# EAGLE board thermal-flashlight-32u4-many (EAGLE 6.5.0)
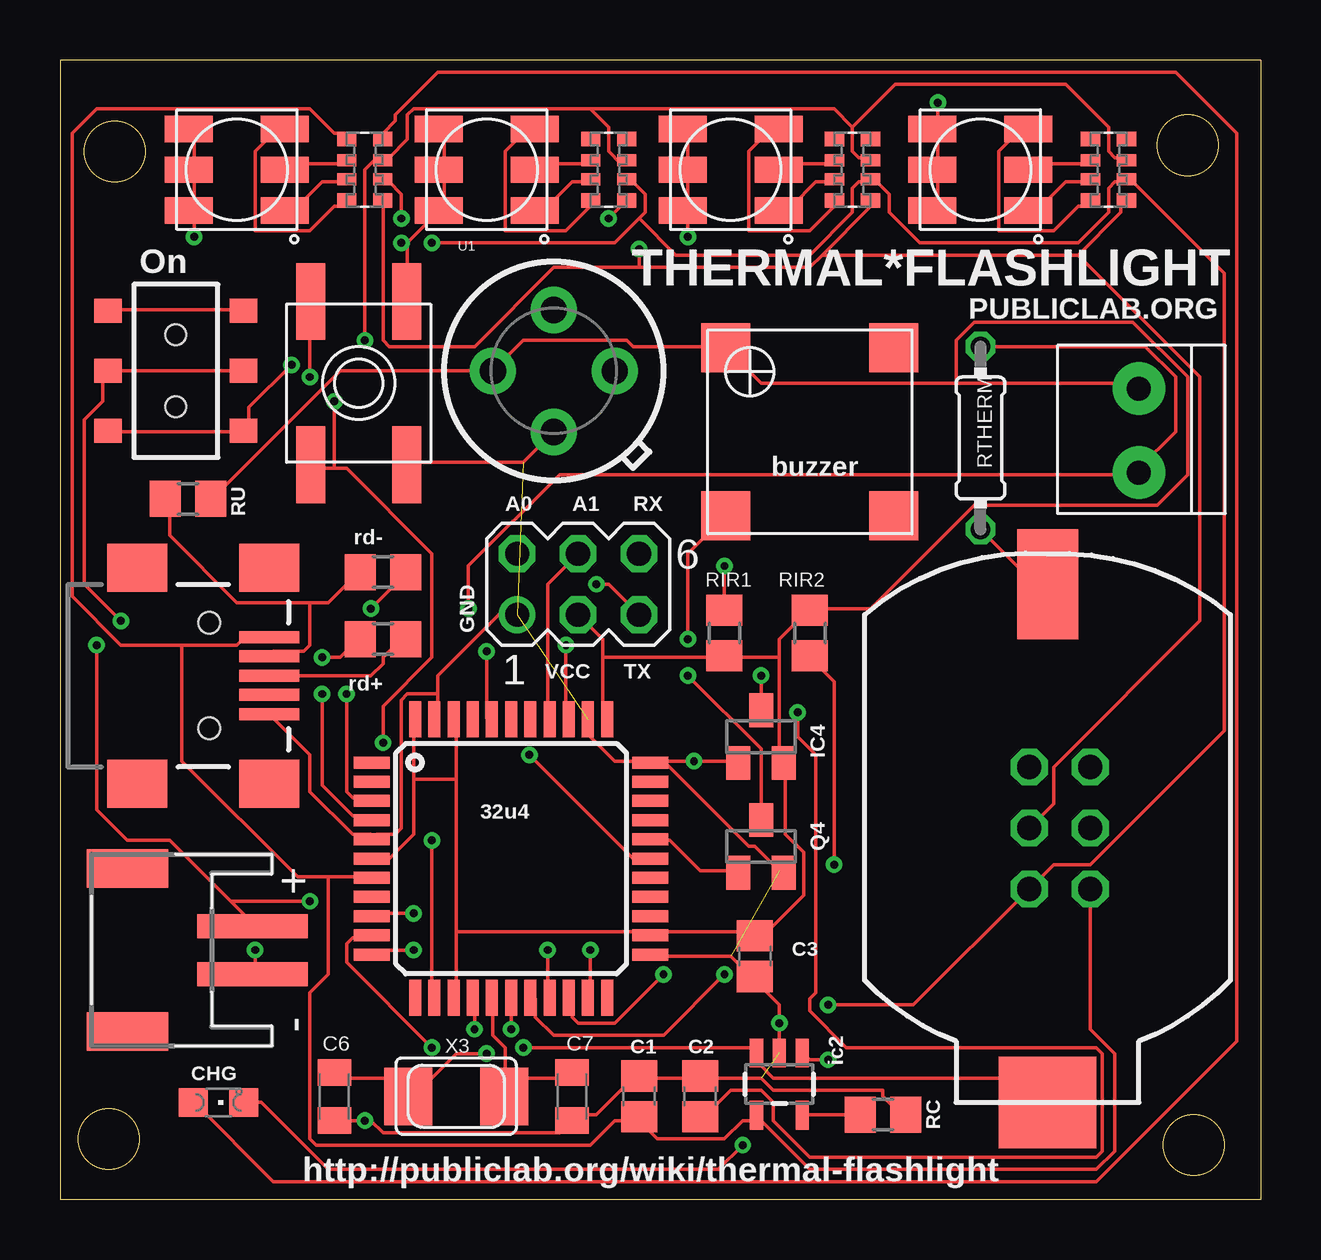
[diagram p0: board, top side]
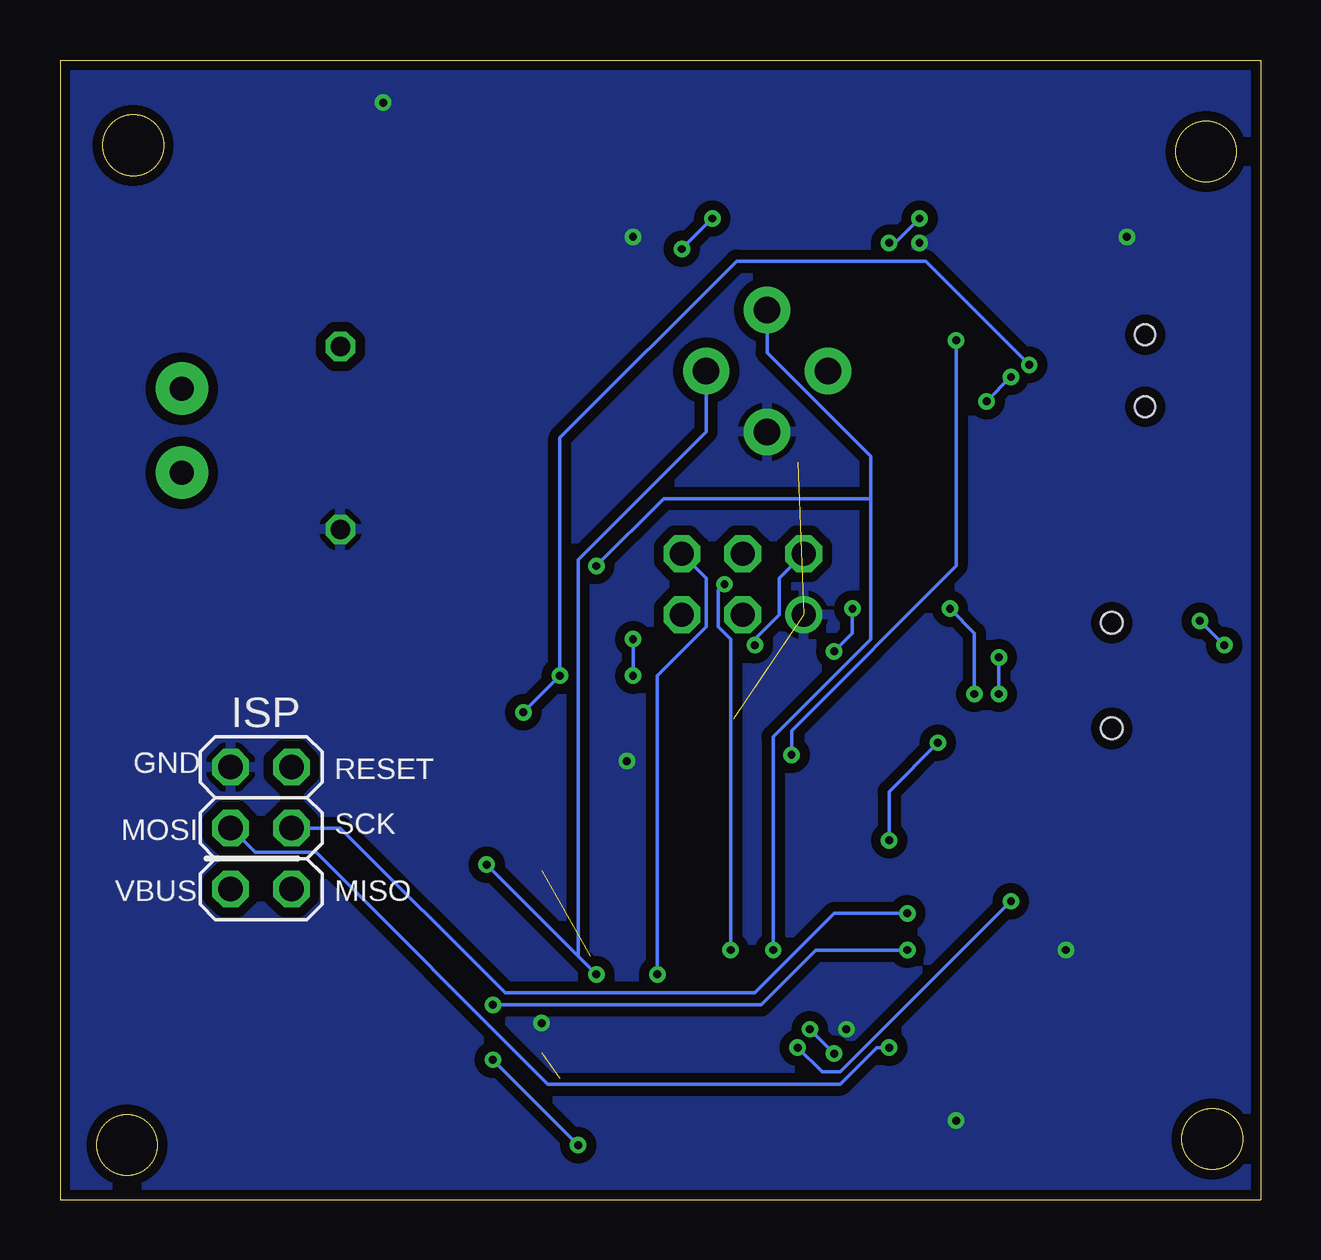
[diagram p1: board, bottom side, seen from below]

Size 50.04 x 47.5 mm. Coordinates in mm from the lower left corner, seen from the top.
Outline: 50.04,47.5 0,47.5 0,0 50.04,0 50.04,47.5
Outline: circle at 2.03,2.54 radius 1.27
Outline: circle at 2.29,43.69 radius 1.27
Outline: circle at 46.99,43.94 radius 1.27
Outline: circle at 47.24,2.29 radius 1.27
Copper layers (1*16): Top 0.0356mm / dielectric 1.5011mm / Bottom 0.0356mm
Design rules "LaenPCBOrder": minimum track width 6mil, minimum drill 13mil, track to track 6mil, track to pad 6mil, pad to pad 6mil, via to via 6mil, smd to smd 6mil, copper to edge 15mil, drill to drill 6mil, minimum pad ring 7mil, minimum via ring 7mil, stop-mask expansion 3mil, vias tented up to drill 0mil, thermal gap 10mil
Net classes: 1 power: width 0.254 mm, clearance 0.203 mm
vRestrict: area 5.8,3.6 to 7.4,4.3

## Footprints (pad centres in the part's own frame; a part is rotated, then mirrored left to right if it is on the bottom)
BATTCOM_20MM_PTH_SMT = smd 4.572 x 2.54: P$1 0,0 | smd 3.81 x 4.064: P$2 21.59,0
EVQ-Q2 = smd 3.2 x 1.2: A -3.4,-2; A' 3.4,-2; B -3.4,2; B' 3.4,2
C0805 = smd 1.3 x 1.5: 1 -0.85,0; 2 0.85,0
C0805K = smd 1.1 x 1.4: 1 -1,0; 2 1,0
CHIPLED_0805 = smd 1.2 x 1.2: A 0,-1.05; C 0,1.05
JST-PH-2-SMT-RA = smd 1 x 4.6: 1 1,-3.7; 2 -1,-3.7 | smd 1.6 x 3.4: NC1 -3.4,1.5; NC2 3.4,1.5
SOT23-5 = smd 0.55 x 1.2: 1 -0.95,-1.3; 2 0,-1.3; 3 0.95,-1.3; 4 0.95,1.3; 5 -0.95,1.3
TQFP44 = smd 1.5 x 0.5: 1 -5.8,4; 2 -5.8,3.2; 3 -5.8,2.4; 4 -5.8,1.6; 5 -5.8,0.8; 6 -5.8,0; 7 -5.8,-0.8; 8 -5.8,-1.6; 9 -5.8,-2.4; 10 -5.8,-3.2; 11 -5.8,-4; 23 5.8,-4; 24 5.8,-3.2; 25 5.8,-2.4; 26 5.8,-1.6; 27 5.8,-0.8; 28 5.8,0; 29 5.8,0.8; 30 5.8,1.6; 31 5.8,2.4; 32 5.8,3.2; 33 5.8,4 | smd 0.5 x 1.5: 12 -4,-5.8; 13 -3.2,-5.8; 14 -2.4,-5.8; 15 -1.6,-5.8; 16 -0.8,-5.8; 17 0,-5.8; 18 0.8,-5.8; 19 1.6,-5.8; 20 2.4,-5.8; 21 3.2,-5.8; 22 4,-5.8; 34 4,5.8; 35 3.2,5.8; 36 2.4,5.8; 37 1.6,5.8; 38 0.8,5.8; 39 0,5.8; 40 -0.8,5.8; 41 -1.6,5.8; 42 -2.4,5.8; 43 -3.2,5.8; 44 -4,5.8
SOT23 = smd 1 x 1.4: 1 -0.95,-1.1; 2 0.95,-1.1; 3 0,1.1
2X03 = drill 1.016 octagon: 1 -2.54,-1.27; 2 -2.54,1.27; 3 0,-1.27; 4 0,1.27; 5 2.54,-1.27; 6 2.54,1.27
AYZ0202 = smd 1 x 1.15: 1 -2.5,2.825; 2 0,2.825; 3 2.5,2.825; 4 -2.5,-2.825; 5 0,-2.825; 6 2.5,-2.825 | hole 0.85: 1.5,0; -1.5,0
1X2-3.5MM = drill 1 pad 2.184: 1 1.8,0; 2 -1.7,0
RGBLED5050 = smd 2 x 1.1: 1 -2,1.7; 2 -2,0; 3 -2,-1.7; 4 2,-1.7; 5 2,0; 6 2,1.7
R0805 = smd 1.3 x 1.5: 1 -0.95,0; 2 0.95,0
EXB38V = smd 0.6 x 0.8: 1 -1.275,-0.75; 4 1.275,-0.75; 5 1.275,0.75; 8 -1.275,0.75 | smd 0.5 x 0.8: 2 -0.4,-0.75; 3 0.4,-0.75; 6 0.4,0.75; 7 -0.4,0.75
0204/7 = drill 0.813 octagon: 1 -3.81,0; 2 3.81,0
MA03-2 = drill 1.016: 1 -2.54,-1.27 | drill 1.016 octagon: 2 -2.54,1.27; 3 0,-1.27; 4 0,1.27; 5 2.54,-1.27; 6 2.54,1.27
TO-39 = drill 1.1 pad 1.93: 1 2.54,0; 2 0,2.54; 3 -2.54,0; 4 0,-2.54
SMT-8585-BUZZER = smd 2.05 x 2.05: + -3.5,-3.5; - 3.5,-3.5; NC1 -3.5,3.5; NC2 3.5,3.5
USB-MINIB = smd 2.5 x 0.5: D+ 2.5,0; D- 2.5,0.8; GND 2.5,-1.6; ID 2.5,-0.8; VBUS 2.5,1.6 | smd 2.5 x 2: GND@1 -3,-4.5; GND@2 -3,4.5; GND@3 2.5,4.5; GND@4 2.5,-4.5 | hole 0.9: 0,2.2; 0,-2.2
NX5032 = smd 2 x 2.4: P$1 2,0; P$2 -2,0

## Placement (x,y rotation side)
BAT1  LIR2032  [BATTCOM_20MM_PTH_SMT]  41.15,25.65 270 top
BTN  [EVQ-Q2]  12.45,34.04 90 top
C1  10u  [C0805]  24.13,4.32 90 top
C2  10u  [C0805]  26.67,4.32 90 top
C3  10u  [C0805]  28.96,10.16 270 top
C6  18pF  [C0805K]  11.43,4.32 270 top
C7  18pF  [C0805K]  21.34,4.32 270 top
CHG  0805  [CHIPLED_0805]  6.6,4.06 270 top
CN1  [JST-PH-2-SMT-RA]  4.32,10.41 90 top
IC2  MCP73831  [SOT23-5]  29.97,4.83 180 top
IC3  ATMEGA32U4-AU  [TQFP44]  18.8,14.22 0 top
IC4  MCP1700-33  [SOT23]  29.21,19.3 0 top
ISP  [2X03]  41.66,15.49 90 bottom
J1  AYZ0202  [AYZ0202]  4.83,34.54 90 top
J2  1X2-3.5MM  [1X2-3.5MM]  44.96,32 90 top
LED  RGBLED5050  [RGBLED5050]  7.37,42.93 180 top
LED1  RGBLED5050  [RGBLED5050]  17.78,42.93 180 top
LED2  RGBLED5050  [RGBLED5050]  27.94,42.93 180 top
LED3  RGBLED5050  [RGBLED5050]  38.35,42.93 180 top
Q4  BSS123  [SOT23]  29.21,14.73 0 top
RC  22K  [R0805]  34.29,3.56 180 top
RD+  47  [R0805]  13.46,23.37 180 top
RD-  47  [R0805]  13.46,26.16 0 top
RIR1  10K  [R0805]  27.69,23.62 270 top
RIR2  10K  [R0805]  31.24,23.62 90 top
RN1  [EXB38V]  12.7,42.93 90 top
RN2  [EXB38V]  22.86,42.93 90 top
RN3  [EXB38V]  33.02,42.93 90 top
RN4  [EXB38V]  43.69,42.93 90 top
RTHERM  330  [0204/7]  38.35,31.75 90 top
RU  1.5K  [R0805]  5.33,29.21 0 top
SV1  [MA03-2]  21.59,25.65 0 top
U1  MLX90614_  [TO-39]  20.57,34.54 0 top
U$1  BUZZER  [SMT-8585-BUZZER]  31.24,32 270 top
X1  USBSMD  [USB-MINIB]  6.22,21.84 0 top
X3  8MHz  [NX5032]  16.51,4.32 0 top

## Library data of the parts
BAT1 IC2 J1 = SparkFunNew
BTN C6 C7 CN1 IC4 J2 LED LED1-LED3 U$1 = adafruit
C1-C3 = resistor
CHG = led
IC3 X3 = adaprog
ISP = pinhead
Q4 = transistor-small-signal
RC RD+ RD- RIR1 RIR2 RTHERM RU = rcl
RN1-RN4 = resistor-dil; OC_FARNELL: unknown; OC_NEWARK: unknown
SV1 = con-lstb; OC_FARNELL: unknown; OC_NEWARK: unknown
U1 X1 = SparkFun

## Nets
A0: IC3.36 SV1.2
A1: IC3.37 SV1.4
A2: IC3.38
A3: IC3.39
A4: IC3.40 J2.2 RTHERM.2
A5: IC3.41
D0/RX: IC3.20 SV1.6
D1/TX: IC3.21 SV1.5
D4_A6: IC3.25
D6*: IC3.27
D7: IC3.1
D8: IC3.28 RN1.3 RN2.3 RN3.3 RN4.3
D9: IC3.29 Q4.1
D11: IC3.12
D+: RD+.1 X1.D+
D-: RD-.1 RU.1 X1.D-
GND: BAT1.P$1 BTN.A BTN.A' C1.2 C2.2 C3.2 C6.2 C7.2 CN1.2 IC2.2 IC3.5 IC3.15 IC3.23 IC3.33 IC3.35 IC3.43 IC4.1 ISP.6 LED1.4 LED1.5 LED1.6 LED2.4 LED2.5 LED2.6 LED3.4 LED3.5 LED3.6 LED.4 LED.5 LED.6 Q4.2 RC.1 RTHERM.1 SV1.1 U1.4 X1.GND
IO10*: IC3.30
IO12*: IC3.26
MISO: IC3.11 ISP.1 RN1.2 RN2.2 RN3.2 RN4.2
MOSI: IC3.10 ISP.4
N$1: J1.3 J1.6
N$2: LED1.3 RN2.8
N$3: LED1.1 RN2.7
N$4: LED.3 RN1.8
N$5: CHG.C IC2.1
N$6: IC2.5 RC.2
N$7: Q4.3 U$1.-
N$8: LED.1 RN1.7
N$9: LED.2 RN1.6
N$10: CHG.A RN1.4
N$11: IC3.4 RD+.2
N$12: LED1.2 RN2.6
N$13: LED2.3 RN3.8
N$14: LED2.1 RN3.7
N$15: C7.1 IC3.16 X3.P$1
N$16: C6.1 IC3.17 X3.P$2
N$17: LED2.2 RN3.6
N$18: IC3.3 RD-.2
N$19: LED3.3 RN4.8
N$20: LED3.1 RN4.7
N$21: LED3.2 RN4.6
PC6: IC3.31
PC7: IC3.32
RESET: ISP.5
RST: BTN.B BTN.B' IC3.13
RXLED/SS: IC3.8
SCK: IC3.9 ISP.3 RN1.1 RN2.1 RN3.1 RN4.1
SCL: IC3.18 RIR2.1 U1.1
SDA: IC3.19 RIR1.1 U1.2
TXLED: IC3.22
VBAT: BAT1.P$2 CN1.1 IC2.3 J1.2 J1.5
VBUS: C1.1 IC2.4 IC3.7 ISP.2 RN1.5 X1.VBUS
VCC: C3.1 IC3.6 IC3.14 IC3.24 IC3.34 IC3.42 IC3.44 IC4.2 J2.1 RIR1.2 RIR2.2 RU.2 SV1.3 U1.3 U$1.+
VDD: C2.1 IC4.3 J1.1 J1.4

## Tracks (layer width: path | path; a pad name or v marks a point on that pad's centre or on a via)
A0  (via drill 0.33)
  Top 0.152: v21.08,23.11 21.08,20.07 IC3.36
  Bottom 0.152: v21.08,23.11 21.08,23.37 20.07,24.38 20.07,25.91 SV1.2
A1
  Top 0.152: SV1.4 20.32,25.65 20.32,20.07 IC3.37
A4  (via drill 0.33)
  Top 0.152: v17.78,22.86 17.78,20.07 IC3.40 | v17.02,24.64 17.02,26.42 20.83,30.23 44.96,30.23 J2.2 44.96,30.48 46.48,32 46.48,34.29 45.21,35.56 RTHERM.2
  Bottom 0.152: v17.78,22.86 17.02,23.62 v17.02,24.64
D0/RX  (via drill 0.33)
  Top 0.152: v25.15,9.4 23.11,7.37 21.59,7.37 21.34,7.62 21.34,8.38 IC3.20
  Bottom 0.152: v25.15,9.4 25.15,21.84 23.11,23.88 23.11,25.91 SV1.6
D1/TX  (via drill 0.33)
  Top 0.152: v22.1,10.41 22.1,8.64 IC3.21 | v22.35,25.65 22.86,25.65 SV1.5
  Bottom 0.152: v22.1,10.41 22.1,23.37 22.61,23.88 22.61,25.4 v22.35,25.65
D8  (via drill 0.33)
  Top 0.152: 22.1,45.47 14.73,45.47 14.48,45.21 14.48,44.2 13.72,43.43 13.46,43.43 RN1.3 13.21,43.43 12.7,42.93 v12.7,35.81 | 22.1,45.47 22.86,44.7 22.86,43.69 23.37,43.18 RN2.3 | 33.02,44.7 33.02,43.69 33.27,43.43 33.53,43.43 RN3.3 | 33.02,44.7 32.26,45.47 22.1,45.47 | 33.02,44.7 34.8,46.48 41.91,46.48 43.69,44.7 43.69,43.69 43.94,43.43 44.2,43.43 RN4.3 | IC3.28 23.88,14.22 v19.56,18.54
  Bottom 0.152: v19.56,18.54 19.56,19.56 12.7,26.42 v12.7,35.81
D9
  Top 0.152: Q4.1 28.19,13.72 26.67,13.72 25.4,14.99 24.64,14.99 IC3.29
D+
  Top 0.152: X1.D+ 12.95,21.84 13.46,22.35 13.46,22.61 14.22,23.37 RD+.1
D-
  Top 0.152: 10.41,24.89 11.18,24.89 12.45,26.16 RD-.1 | 10.41,24.89 7.37,24.89 4.57,27.69 4.57,29.21 RU.1 | 10.41,24.89 10.41,23.11 10.16,22.86 8.89,22.86 X1.D-
GND  (via drill 0.33)  (4 unrouted)
  Top 0.152: C6.2 11.43,3.3 v12.7,3.3 12.95,3.3 13.46,2.79 20.83,2.79 21.34,3.3 C7.2 21.34,3.56 22.35,3.56 24.13,5.33 C1.2 24.13,5.08 26.67,5.08 | 26.67,5.08 29.21,5.08 29.72,4.57 34.29,4.57 34.29,4.32 35.05,3.56 RC.1 | 26.67,5.08 C2.2 | 25.15,18.29 24.64,18.29 IC3.33 | 25.15,18.29 v26.42,18.29 28.19,18.29 IC4.1 | 25.15,18.29 28.7,14.73 28.96,14.73 29.97,13.72 Q4.2 | 25.15,18.29 IC3.33 | IC3.35 22.1,19.81 22.1,19.3 23.11,18.29 24.38,18.29 IC3.33 | 16,42.93 16,41.4 LED1.6 15.75,41.15 14.48,39.88 | 16,42.93 16,44.45 LED1.4 | 16,42.93 LED1.5 | 14.48,39.88 14.48,37.59 BTN.A' | X1.GND 8.89,20.07 10.41,18.54 10.41,17.02 12.19,15.24 12.95,15.24 IC3.5 13.21,15.24 13.97,15.24 14.22,15.49 14.22,20.83 14.48,21.08 15.75,21.08 | IC2.2 v29.97,7.37 29.97,8.13 28.96,9.14 | 28.96,9.14 27.94,10.16 24.64,10.16 IC3.23 | 28.96,9.14 C3.2 | 36.58,42.93 36.58,41.4 LED3.6 | 36.58,42.93 36.58,44.45 LED3.4 36.58,44.7 v36.58,45.72 | 36.58,42.93 LED3.5 | 26.16,42.93 26.16,41.4 LED2.6 26.16,41.15 v26.16,40.13 | 26.16,42.93 26.16,44.45 LED2.4 | 26.16,42.93 LED2.5 | 5.59,42.93 5.59,41.4 LED.6 5.59,41.15 v5.59,40.13 | 5.59,42.93 5.59,44.45 LED.4 | 5.59,42.93 LED.5 | v17.27,7.11 17.27,8.38 IC3.15 | 15.75,21.08 15.75,21.84 18.29,24.38 SV1.1 | 15.75,21.08 15.75,20.07 IC3.43 | U1.4 19.3,30.73 14.48,30.73 BTN.A | BAT1.P$1 40.64,25.65 RTHERM.1 | v8.13,10.41 8.13,9.65 CN1.2 | v14.22,39.88 14.48,39.88
  pour Bottom (isolate 0.406): 0,47.5 50.04,47.5 50.04,0 0,0
MISO  (via drill 0.33)
  Top 0.152: v14.22,40.89 14.22,41.91 13.72,42.42 13.46,42.42 RN1.2 | v15.49,39.88 23.11,39.88 24.13,40.89 | 24.13,40.89 24.38,41.15 24.38,41.91 23.62,42.67 RN2.2 | 24.13,40.89 25.65,39.37 31.24,39.37 33.02,41.15 33.02,42.16 33.27,42.42 33.53,42.42 RN3.2 33.78,42.67 34.54,41.91 34.54,41.15 35.81,39.88 42.42,39.88 43.69,41.15 43.69,42.16 43.94,42.42 44.2,42.42 RN4.2 44.45,42.42 44.7,42.42 48.51,38.61 48.51,19.56 42.93,13.97 41.4,13.97 ISP.1 35.56,8.13 v32,8.13 | v14.73,10.41 13.21,10.41 IC3.11
  Bottom 0.152: v14.22,40.89 15.24,39.88 v15.49,39.88 | v14.73,10.41 18.54,10.41 20.83,8.13 v32,8.13
MOSI  (via drill 0.33)
  Top 0.152: v15.49,6.35 11.94,9.91 11.94,10.67 12.19,10.92 12.95,10.92 IC3.10
  Bottom 0.152: v15.49,6.35 16,6.35 17.53,4.83 29.72,4.83 39.37,14.48 41.91,14.48 ISP.4
N$1
  Top 0.152: J1.3 2.03,37.08 7.62,37.08 J1.6
N$2
  Top 0.152: RN2.8 22.1,41.4 21.08,40.39 18.54,40.39 18.54,43.69 19.56,44.7 LED1.3
N$3
  Top 0.152: RN2.7 22.1,42.42 21.34,42.42 20.32,41.4 19.81,41.4 LED1.1
N$4
  Top 0.152: RN1.8 11.94,41.4 11.43,41.4 10.41,40.39 8.13,40.39 8.13,43.69 9.14,44.7 LED.3
N$5  (via drill 0.33)
  Top 0.152: CHG.C 8.38,4.06 11.18,1.27 27.43,1.27 v28.45,2.29 | v32,5.84 31.24,5.84 30.99,6.1 IC2.1
  Bottom 0.152: v32,5.84 v28.45,2.29
N$6
  Top 0.152: RC.2 30.99,3.56 IC2.5
N$7  (via drill 0.33)
  Top 0.152: Q4.3 29.21,18.8 v26.16,21.84 | v26.16,23.37 26.16,26.92 U$1.-
  Bottom 0.152: v26.16,23.37 v26.16,21.84
N$8
  Top 0.152: RN1.7 11.94,42.42 10.92,42.42 9.91,41.4 9.4,41.4 LED.1
N$9
  Top 0.152: RN1.6 11.94,43.18 9.65,43.18 9.4,42.93 LED.2
N$10
  Top 0.152: RN1.4 13.46,44.45 13.97,44.96 13.97,45.21 15.75,46.99 46.48,46.99 49.02,44.45 49.02,6.6 43.18,0.76 8.89,0.76 5.59,4.06 CHG.A
N$11  (via drill 0.33)
  Top 0.152: v10.92,21.08 10.92,17.27 12.19,16 12.95,16 IC3.4 | v10.92,22.61 11.68,22.61 12.45,23.37 RD+.2
  Bottom 0.152: v10.92,22.61 v10.92,21.08
N$12
  Top 0.152: RN2.6 22.1,43.18 20.07,43.18 19.81,42.93 LED1.2
N$13
  Top 0.152: RN3.8 32.26,41.4 31.24,40.39 28.7,40.39 28.7,43.69 29.72,44.7 LED2.3
N$14
  Top 0.152: RN3.7 32.26,42.42 31.5,42.42 30.48,41.4 29.97,41.4 LED2.1
N$15
  Top 0.152: 18.54,4.32 19.3,5.08 21.34,5.08 C7.1 | 18.54,4.32 18.54,6.35 18.03,6.86 18.03,8.38 IC3.16 | 18.54,4.32 X3.P$1
N$16  (via drill 0.33)
  Top 0.152: C6.1 11.43,5.08 13.72,5.08 14.48,4.32 X3.P$2 14.73,4.32 16.51,6.1 v17.78,6.1 | v18.8,7.11 IC3.17
  Bottom 0.152: v17.78,6.1 v18.8,7.11
N$17
  Top 0.152: RN3.6 32.26,43.18 30.23,43.18 29.97,42.93 LED2.2
N$18  (via drill 0.33)
  Top 0.152: v11.94,21.08 11.94,17.02 12.19,16.76 12.95,16.76 IC3.3 | v12.95,24.64 14.48,26.16 RD-.2
  Bottom 0.152: v11.94,21.08 11.94,23.62 v12.95,24.64
N$19
  Top 0.152: RN4.8 42.93,41.4 42.42,41.4 41.4,40.39 39.12,40.39 39.12,43.69 40.13,44.7 LED3.3
N$20
  Top 0.152: RN4.7 42.93,42.42 41.91,42.42 40.89,41.4 40.39,41.4 LED3.1
N$21
  Top 0.152: RN4.6 42.93,43.18 40.64,43.18 40.39,42.93 LED3.2
RST  (via drill 0.33)
  Top 0.152: v15.49,14.99 15.49,8.64 IC3.13 | v13.46,19.05 13.46,20.57 15.49,22.61 15.49,26.92 11.94,30.48 11.43,30.48 | 11.43,30.48 10.67,30.48 BTN.B | v10.41,34.29 10.41,37.34 BTN.B' | 11.43,30.48 v11.43,33.27
  Bottom 0.152: v15.49,14.99 15.49,17.02 v13.46,19.05 | v11.43,33.27 v10.41,34.29
SCK  (via drill 0.33)
  Top 0.152: 24.13,38.86 31.24,38.86 31.75,39.37 | 24.13,38.86 20.57,38.86 17.27,35.56 13.72,35.56 13.46,35.81 13.46,41.4 RN1.1 | 31.75,39.37 33.78,41.4 RN3.1 | v22.86,40.89 23.37,41.4 RN2.1 | 24.13,38.86 v24.13,39.62 | 42.42,39.37 44.2,41.15 44.2,41.4 RN4.1 | 31.75,39.37 42.42,39.37 | v14.73,11.94 13.21,11.94 IC3.9 | 42.42,39.37 47.5,34.29 47.5,24.13 41.4,18.03 41.4,16.51 ISP.3
  Bottom 0.152: v24.13,39.62 v22.86,40.89 | v14.73,11.94 17.78,11.94 21.08,8.64 31.5,8.64 38.35,15.49 ISP.3
SCL  (via drill 0.33)
  Top 0.152: v27.69,9.4 25.15,6.86 20.57,6.86 19.81,7.62 19.81,8.38 IC3.18 | v32.26,13.97 32.26,21.59 31.24,22.61 RIR2.1
  Bottom 0.152: v32.26,13.97 28.45,10.16 | 28.45,10.16 v27.69,9.4 | U1.1 23.11,32 28.45,26.67 28.45,10.16
SDA  (via drill 0.33)
  Top 0.152: v20.32,10.41 20.32,8.64 IC3.19 | v27.69,26.42 RIR1.1
  Bottom 0.152: v20.32,10.41 20.32,19.3 16.26,23.37 16.26,29.21 | 16.26,29.21 16.26,30.99 20.57,35.31 U1.2 | v27.69,26.42 24.89,29.21 16.26,29.21
VBAT  (via drill 0.33)
  Top 0.152: BAT1.P$2 40.13,5.08 29.72,5.08 29.21,5.59 29.21,6.1 IC2.3 28.96,6.35 v19.3,6.35 | J1.5 J1.2 1.78,34.54 1.78,33.27 1.02,32.51 1.02,25.65 v2.54,24.13 | v1.52,23.11 1.52,16.26 2.79,14.99 4.57,14.99 7.11,12.45 | 7.11,12.45 8.13,11.43 CN1.1 | 7.11,12.45 v10.41,12.45
  Bottom 0.152: v1.52,23.11 v2.54,24.13 | v19.3,6.35 18.29,5.33 17.53,5.33 v10.41,12.45
VBUS
  Top 0.152: 24.13,3.3 24.89,2.54 27.69,2.54 28.45,3.3 28.96,3.3 IC2.4 29.21,3.3 31.24,1.27 43.18,1.27 43.94,2.03 43.94,6.1 42.93,7.11 ISP.2 | 5.08,23.11 7.37,23.11 7.62,23.37 8.64,23.37 X1.VBUS | 5.08,23.11 2.54,23.11 0.51,25.15 0.51,44.45 1.52,45.47 10.41,45.47 11.43,44.45 11.94,44.45 RN1.5 | 11.18,13.46 9.91,13.46 5.08,18.29 5.08,23.11 | 11.18,13.46 12.95,13.46 IC3.7 | 24.13,3.3 23.11,3.3 22.1,2.29 10.67,2.29 10.41,2.54 10.41,8.64 11.18,9.4 11.18,13.46 | 24.13,3.3 C1.1
VCC
  Top 0.152: 22.61,22.61 22.61,23.37 SV1.3 | 22.61,22.61 22.61,20.07 IC3.34 | 29.97,22.61 29.97,23.37 31.24,24.64 | 29.97,22.61 29.97,18.29 IC4.2 30.23,18.03 30.23,15.24 30.99,14.48 30.99,12.7 29.46,11.18 28.96,11.18 | 29.97,22.61 27.69,22.61 | 27.69,22.61 22.61,22.61 | 27.69,22.61 RIR1.2 | IC3.6 13.72,14.22 14.73,15.24 14.73,17.53 | 14.73,17.53 14.73,19.81 IC3.44 | 28.96,11.18 24.64,11.18 IC3.24 24.38,11.18 16.51,11.18 | 16.51,17.53 16.51,19.81 IC3.42 | 16.51,17.53 16.51,11.18 | 16.51,11.18 16.51,8.64 IC3.14 | 16.51,17.53 14.73,17.53 | 28.96,11.18 C3.1 | RU.2 6.35,29.21 11.68,34.54 U1.3 19.3,35.81 23.62,35.81 23.88,35.56 27.69,35.56 U$1.+ 29.21,34.04 37.34,34.04 | 37.34,34.04 44.96,34.04 J2.1 | 31.24,24.64 33.78,24.64 38.1,28.96 45.72,28.96 46.99,30.23 46.99,34.29 44.7,36.58 38.1,36.58 37.34,35.81 37.34,34.04 | 31.24,24.64 RIR2.2
VDD  (via drill 0.33)
  Top 0.152: J1.1 2.03,32 7.62,32 J1.4 7.87,32.26 7.87,33.02 v9.65,34.8 | v29.21,21.84 IC4.3 | v30.73,20.32 30.73,19.3 31.5,18.54 31.5,8.64 31.24,8.38 31.24,7.87 32.77,6.35 43.18,6.35 43.43,6.1 43.43,2.03 43.18,1.78 31.24,1.78 29.72,3.3 29.72,4.06 29.21,4.57 27.94,4.57 26.67,3.3 C2.1
  Bottom 0.152: v30.73,20.32 v29.21,21.84 29.21,31.75 21.84,39.12 13.97,39.12 v9.65,34.8

## Text on the board
bPlace: RESET | GND | SCK | MOSI | MISO | VBUS
tNames: THERMAL*FLASHLIGHT | On | PUBLICLAB.ORG | buzzer | A0 | A1 | RX | rd- | GND | rd+ | VCC | TX | IC4 | 32u4 | Q4 | ic2 | http://publiclab.org/wiki/thermal-flashlight